# EAGLE board testbed_v1 (EAGLE 6.6.0)

Size 160 x 100 mm. Coordinates in mm from the lower left corner, seen from the top.
Outline: 0,0 160,0 160,100 0,100 0,0
Copper layers (1*16): Top 0.035mm / dielectric 1.5mm / Bottom 0.035mm
Design rules "default": minimum track width 10mil, minimum drill 24mil, track to track 8mil, track to pad 8mil, pad to pad 8mil, via to via 8mil, smd to smd 8mil, copper to edge 40mil, drill to drill 8mil, minimum pad ring 10mil, minimum via ring 8mil, stop-mask expansion 4mil, vias tented up to drill 0mil, thermal gap 10mil

## Footprints (pad centres in the part's own frame; a part is rotated, then mirrored left to right if it is on the bottom)
C0805 = smd 1.3 x 1.5: 1 -0.95,0; 2 0.95,0
E2,5-6 = drill 0.813 pad 1.6: + -1.27,0 | drill 0.813 pad 1.6 octagon: - 1.27,0
DO41Z10 = drill 1.118: A 5.08,0; C -5.08,0
DO41-7.6 = drill 1.1 pad 1.7: A 3.81,0; C -3.81,0
3,0-PAD = drill 3 pad 5.842: B3,0 0,0
R0805 = smd 1.3 x 1.5: 1 -0.95,0; 2 0.95,0
0207/10 = drill 0.813 octagon: 1 -5.08,0; 2 5.08,0
1X01_ROUND = drill 1 pad 1.676: 1 0,0
SO-20LD = smd 0.762 x 1.524: 1 -5.715,-4.775; 2 -4.445,-4.775; 3 -3.175,-4.775; 4 -1.905,-4.775; 5 -0.635,-4.775; 6 0.635,-4.775; 7 1.905,-4.775; 8 3.175,-4.775; 9 4.445,-4.775; 10 5.715,-4.775; 11 5.715,4.75; 12 4.445,4.775; 13 3.175,4.775; 14 1.905,4.775; 15 0.635,4.775; 16 -0.635,4.775; 17 -1.905,4.775; 18 -3.175,4.775; 19 -4.445,4.775; 20 -5.715,4.775
STM32NUCLEO = drill 0.8 pad 1.422 square: 7.1 -31.75,22.86; 10.1 29.21,22.86 | drill 0.8 pad 1.422: 7.2 -29.21,22.86; 7.3 -31.75,20.32; 7.4 -29.21,20.32; 7.5 -31.75,17.78; 7.6 -29.21,17.78; 7.7 -31.75,15.24; 7.8 -29.21,15.24; 7.9 -31.75,12.7; 7.10 -29.21,12.7; 7.11 -31.75,10.16; 7.12 -29.21,10.16; 7.13 -31.75,7.62; 7.14 -29.21,7.62; 7.15 -31.75,5.08; 7.16 -29.21,5.08; 7.17 -31.75,2.54; 7.18 -29.21,2.54; 7.19 -31.75,0; 7.20 -29.21,0; 7.21 -31.75,-2.54; 7.22 -29.21,-2.54; 7.23 -31.75,-5.08; 7.24 -29.21,-5.08; 7.25 -31.75,-7.62; 7.26 -29.21,-7.62; 7.27 -31.75,-10.16; 7.28 -29.21,-10.16; 7.29 -31.75,-12.7; 7.30 -29.21,-12.7; 7.31 -31.75,-15.24; 7.32 -29.21,-15.24; 7.33 -31.75,-17.78; 7.34 -29.21,-17.78; 7.35 -31.75,-20.32; 7.36 -29.21,-20.32; 7.37 -31.75,-22.86; 7.38 -29.21,-22.86; 10.2 31.75,22.86; 10.3 29.21,20.32; 10.4 31.75,20.32; 10.5 29.21,17.78; 10.6 31.75,17.78; 10.7 29.21,15.24; 10.8 31.75,15.24; 10.9 29.21,12.7; 10.10 31.75,12.7; 10.11 29.21,10.16; 10.12 31.75,10.16; 10.13 29.21,7.62; 10.14 31.75,7.62; 10.15 29.21,5.08; 10.16 31.75,5.08; 10.17 29.21,2.54; 10.18 31.75,2.54; 10.19 29.21,0; 10.20 31.75,0; 10.21 29.21,-2.54; 10.22 31.75,-2.54; 10.23 29.21,-5.08; 10.24 31.75,-5.08; 10.25 29.21,-7.62; 10.26 31.75,-7.62; 10.27 29.21,-10.16; 10.28 31.75,-10.16; 10.29 29.21,-12.7; 10.30 31.75,-12.7; 10.31 29.21,-15.24; 10.32 31.75,-15.24; 10.33 29.21,-17.78; 10.34 31.75,-17.78; 10.35 29.21,-20.32; 10.36 31.75,-20.32; 10.37 29.21,-22.86; 10.38 31.75,-22.86
SOIC8 = smd 0.6 x 2.2: 1 -1.905,-2.6; 2 -0.635,-2.6; 3 0.635,-2.6; 4 1.905,-2.6; 5 1.905,2.6; 6 0.635,2.6; 7 -0.635,2.6; 8 -1.905,2.6
SOT363 = smd 0.3 x 1.143: 1 -0.65,-1.016; 2 0,-1.016; 3 0.65,-1.016; 4 0.65,1.016; 5 0,1.016; 6 -0.65,1.016
SMS3922-015LF = smd 1.27 x 1.016: 1 -0.762,-1.143 | smd 0.762 x 1.016: 2 0.965,-1.143; 3 0.965,1.143; 4 -0.965,1.143

## Placement (x,y rotation side)
C1  0.1uF  [C0805]  -6.35,-77.47 0 top  (outside the outline)
C5  10nF  [C0805]  8.89,-59.69 0 top  (outside the outline)
C6  47uF  [E2,5-6]  27.94,-50.8 0 top  (outside the outline)
C7  0.1uF  [C0805]  38.1,-50.8 0 top  (outside the outline)
D3  1N4732A  [DO41Z10]  17.78,-52.07 0 top  (outside the outline)
D4  1N5819-B  [DO41-7.6]  31.75,-41.91 0 top  (outside the outline)
D5  1N5819-B  [DO41-7.6]  5.08,-52.07 0 top  (outside the outline)
H1  MOUNT-PAD-ROUND3.0  [3,0-PAD]  39.37,-27.94 0 top  (outside the outline)
H2  MOUNT-PAD-ROUND3.0  [3,0-PAD]  5.08,-43.18 0 top  (outside the outline)
R1  33k  [R0805]  -6.35,-83.82 0 top  (outside the outline)
R6  10k  [R0805]  33.02,-66.04 0 top  (outside the outline)
R7  7.5k  [R0805]  15.24,-59.69 0 top  (outside the outline)
R8  15k  [R0805]  38.1,-66.04 0 top  (outside the outline)
R9  8.2k  [R0805]  21.59,-59.69 0 top  (outside the outline)
R10  0  [R0805]  27.94,-59.69 0 top  (outside the outline)
R11  12k  [R0805]  27.94,-66.04 0 top  (outside the outline)
R12  33k  [R0805]  34.29,-59.69 0 top  (outside the outline)
R13  0  [R0805]  40.64,-59.69 0 top  (outside the outline)
R14  0.1  [0207/10]  6.35,-72.39 0 top  (outside the outline)
R25  0  [R0805]  2.54,-66.04 0 top  (outside the outline)
R26  DNP  [R0805]  2.54,-59.69 0 top  (outside the outline)
TP3  [1X01_ROUND]  25.4,-72.39 0 top  (outside the outline)
TP4  [1X01_ROUND]  29.21,-72.39 0 top  (outside the outline)
TP5  [1X01_ROUND]  33.02,-72.39 0 top  (outside the outline)
TP6  [1X01_ROUND]  36.83,-72.39 0 top  (outside the outline)
TP11  [1X01_ROUND]  21.59,-72.39 0 top  (outside the outline)
U3  OPA564  [SO-20LD]  19.05,-30.48 0 top  (outside the outline)
U$1  NUCLEO-F401RE  [STM32NUCLEO]  27.94,52.07 90 top
U$2  NUCLEO-F401RE  [STM32NUCLEO]  27.94,52.07 90 top
U$3  TLV5636SOIC(D)  [SOIC8]  -5.08,-69.85 0 top  (outside the outline)
U$4  OPA2134SO-8  [SOIC8]  72.39,33.02 0 top
U$5  LMP8640  [SOT363]  -11.43,-85.09 0 top  (outside the outline)
U$6  SMS3922-015LF  [SMS3922-015LF]  17.78,-72.39 0 top  (outside the outline)
U$7  OPA2134SO-8  [SOIC8]  -17.78,-82.55 0 top  (outside the outline)

## Library data of the parts
C1 C5-C7 R1 R6-R14 R25 R26 = rcl
D3-D5 = diode
H1 H2 = holes
TP3-TP6 TP11 = microbuilder; BOM: EXCLUDE
U3 U$1-U$7 = npol

## Nets
+5V: C1.1 U$3.8
+12V: R12.2
+18V: C5.1 C6.+ C7.1 D4.C R6.1 U3.2 U3.3 U3.4 U3.19 U$4.8 U$5.6 U$7.8
AGND: C1.2 C6.- C7.2 D3.A D5.A R7.1 R11.1 R26.1 U3.1 U3.7 U3.8 U3.10 U3.11 U3.20 U$3.5 U$4.4 U$5.2 U$7.4
BIAS_OUT: R8.2 R10.1 TP4.1 U$4.1
GND: C5.2 H1.B3,0 H2.B3,0 U$2.7.8
ISET: R7.2 U3.12
N$1: U$5.1 U$7.3
N$2: U$4.6 U$4.7
N$3: U$7.1 U$7.2
N$5: R8.1 R9.2 U$4.2
N$6: R10.2 U3.16 U$6.2 U$6.4
N$7: R11.2 R12.1 U$4.3
N$8: R9.1 R13.2 TP11.1
N$9: TP6.1
N$12: R25.1 R26.2 U3.15 U$6.1 U$6.3
OUT: R14.2 U$4.5 U$5.4
PA_OUT: D4.A D5.C R14.1 R25.2 TP5.1 U3.5 U3.6 U$5.3
RFID_TX: R13.1 TP3.1 U$3.7
VDIG: D3.C R6.2 U3.14

## Tracks (layer width: path | path; a pad name or v marks a point on that pad's centre or on a via)
+5V  (1 unrouted)
+18V  (11 unrouted)
AGND  (17 unrouted)
BIAS_OUT  (3 unrouted)
GND  (3 unrouted)
ISET  (1 unrouted)
N$1  (1 unrouted)
N$2  (1 unrouted)
N$3  (1 unrouted)
N$5  (2 unrouted)
N$6  (3 unrouted)
N$7  (2 unrouted)
N$8  (2 unrouted)
N$12  (4 unrouted)
OUT  (2 unrouted)
PA_OUT  (7 unrouted)
RFID_TX  (2 unrouted)
VDIG  (2 unrouted)